# EAGLE board robot-tinkercad (EAGLE 9.7.0)

Size 148.1 x 169.57 mm. Coordinates in mm from the lower left corner, seen from the top.
Outline: 0,0 148.1,0 148.1,169.57 0,169.57 0,0
Copper layers (1*16): Top 0.035mm / dielectric 1.5mm / Bottom 0.035mm
Design rules "default": minimum track width 6mil, minimum drill 0.35mm, track to track 6mil, track to pad 6mil, pad to pad 6mil, via to via 6mil, smd to smd 6mil, copper to edge 40mil, drill to drill 6mil, minimum pad ring 10mil, minimum via ring 8mil, stop-mask expansion 4mil, vias tented up to drill 0mil, thermal gap 10mil

## Footprints (pad centres in the part's own frame; a part is rotated, then mirrored left to right if it is on the bottom)
BATTERY-GENERIC = drill 1.118 pad 3.15 octagon: + 2.54,0; - -2.54,0
CAPPRD254W65D500H1150B = drill 0.85 pad 1.45: 1 -1.27,0; 2 1.27,0
DG01D = drill 1.118 pad 3.15 octagon: + 2.54,0; - -2.54,0
GL5528 = drill 0.8 pad 1.4: 1 -1.702,0; 2 1.702,0
RESAD1016W63L850D250B = drill 0.83 pad 1.43: 1 -5.08,0; 2 5.08,0
ARDUINO-UNO-R3-SHIELD = drill 1.016 pad 1.88: 3.3V 24.13,-2.54; 5V 24.13,0; A0 24.13,12.7; A1 24.13,15.24; A2 24.13,17.78; A3 24.13,20.32; A4 24.13,22.86; A5 24.13,25.4; AREF -24.13,-13.97; D2 -24.13,20.32; D3 -24.13,17.78; D4 -24.13,15.24; D5 -24.13,12.7; D6 -24.13,10.16; D7 -24.13,7.62; D8 -24.13,3.81; D9 -24.13,1.27; D10 -24.13,-1.27; D11 -24.13,-3.81; D12 -24.13,-6.35; D13 -24.13,-8.89; GND@0 24.13,2.54; GND@1 24.13,5.08; GND@2 -24.13,-11.43; IOREF 24.13,-7.62; NC 24.13,-10.16; RES 24.13,-5.08; RX -24.13,25.4; SCL -24.13,-19.05; SDA -24.13,-16.51; TX -24.13,22.86; VIN 24.13,7.62
TO220V = drill 1.016 long: 1 -2.54,-2.54; 2 0,-2.54; 3 2.54,-2.54
DIP762W53P254L1969H508Q16B = drill 0.743 pad 1.343: 1 -3.81,8.89; 2 -3.81,6.35; 3 -3.81,3.81; 4 -3.81,1.27; 5 -3.81,-1.27; 6 -3.81,-3.81; 7 -3.81,-6.35; 8 -3.81,-8.89; 9 3.81,-8.89; 10 3.81,-6.35; 11 3.81,-3.81; 12 3.81,-1.27; 13 3.81,1.27; 14 3.81,3.81; 15 3.81,6.35; 16 3.81,8.89

## Placement (x,y rotation side)
BAT1  9V  [BATTERY-GENERIC]  133.42,63.42 0 top
C1  10u  [CAPPRD254W65D500H1150B]  89.1,84.04 270 top
C2  10u  [CAPPRD254W65D500H1150B]  89.1,94.2 90 top
M1  MOTOR_DG01D  [DG01D]  135.4,94.76 180 top
M2  MOTOR_DG01D  [DG01D]  12.7,95.27 180 top
R3  PHOTOCELL_GL5528  [GL5528]  86.56,143.73 90 top
R4  1k  [RESAD1016W63L850D250B]  78.94,137.38 90 top
R5  1k  [RESAD1016W63L850D250B]  71.32,137.38 90 top
R6  PHOTOCELL_GL5528  [GL5528]  68.78,143.73 90 top
U1  ARDUINO-UNO-R3-SHIELD  [ARDUINO-UNO-R3-SHIELD]  84.05,29.84 270 top
U2  LM7805_TO220V  [TO220V]  81.48,89.12 90 top
U3  L293E  [DIP762W53P254L1969H508Q16B]  75.13,115.79 180 top

## Library data of the parts
BAT1 C1 C2 M1 M2 R3-R6 U1-U3 = Tinkercad

## Nets
BAT1+: BAT1.+ C1.1 U2.1
BAT1-: BAT1.- C1.2 C2.2 R4.1 R5.1 U1.GND@0 U1.GND@1 U1.GND@2 U2.2 U3.4 U3.5 U3.12 U3.13
M1_+: M1.+ U3.6
M1_-: M1.- U3.3
M2_+: M2.+ U3.14
M2_-: M2.- U3.11
U1_5V: R3.2 R6.2 U1.5V U3.16
U1_A0: R5.2 R6.1 U1.A0
U1_A1: R3.1 R4.2 U1.A1
U1_D2: U1.D2 U3.7
U1_D3: U1.D3 U3.2
U1_D4: U1.D4 U3.15
U1_D5: U1.D5 U3.10
U1_D9: U1.D9 U3.1
U1_D10: U1.D10 U3.9
U3_VCC2: C2.1 U2.3 U3.8

## Tracks (layer width: path | path; a pad name or v marks a point on that pad's centre or on a via)
BAT1+  (2 unrouted)
BAT1-  (12 unrouted)
M1_+  (1 unrouted)
M1_-  (1 unrouted)
M2_+  (1 unrouted)
M2_-  (1 unrouted)
U1_5V  (3 unrouted)
U1_A0  (2 unrouted)
U1_A1  (2 unrouted)
U1_D2  (1 unrouted)
U1_D3  (1 unrouted)
U1_D4  (1 unrouted)
U1_D5  (1 unrouted)
U1_D9  (1 unrouted)
U1_D10  (1 unrouted)
U3_VCC2  (2 unrouted)